# EAGLE board Diversity2 (EAGLE 6.5.0)
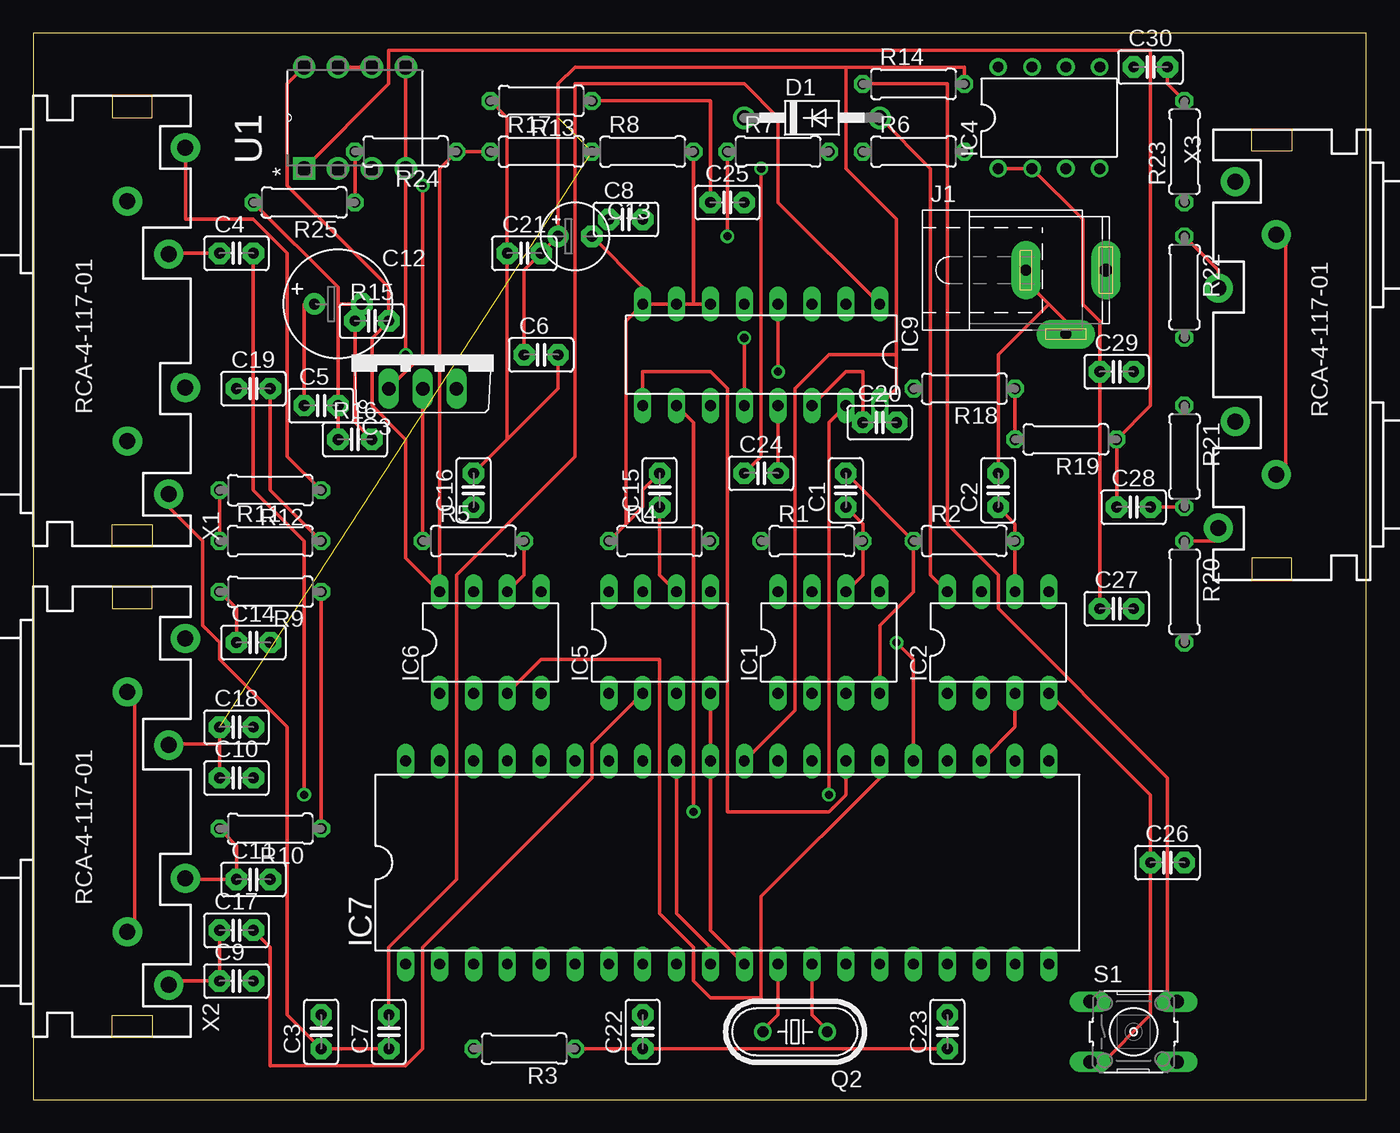
[diagram p0: board, top side]
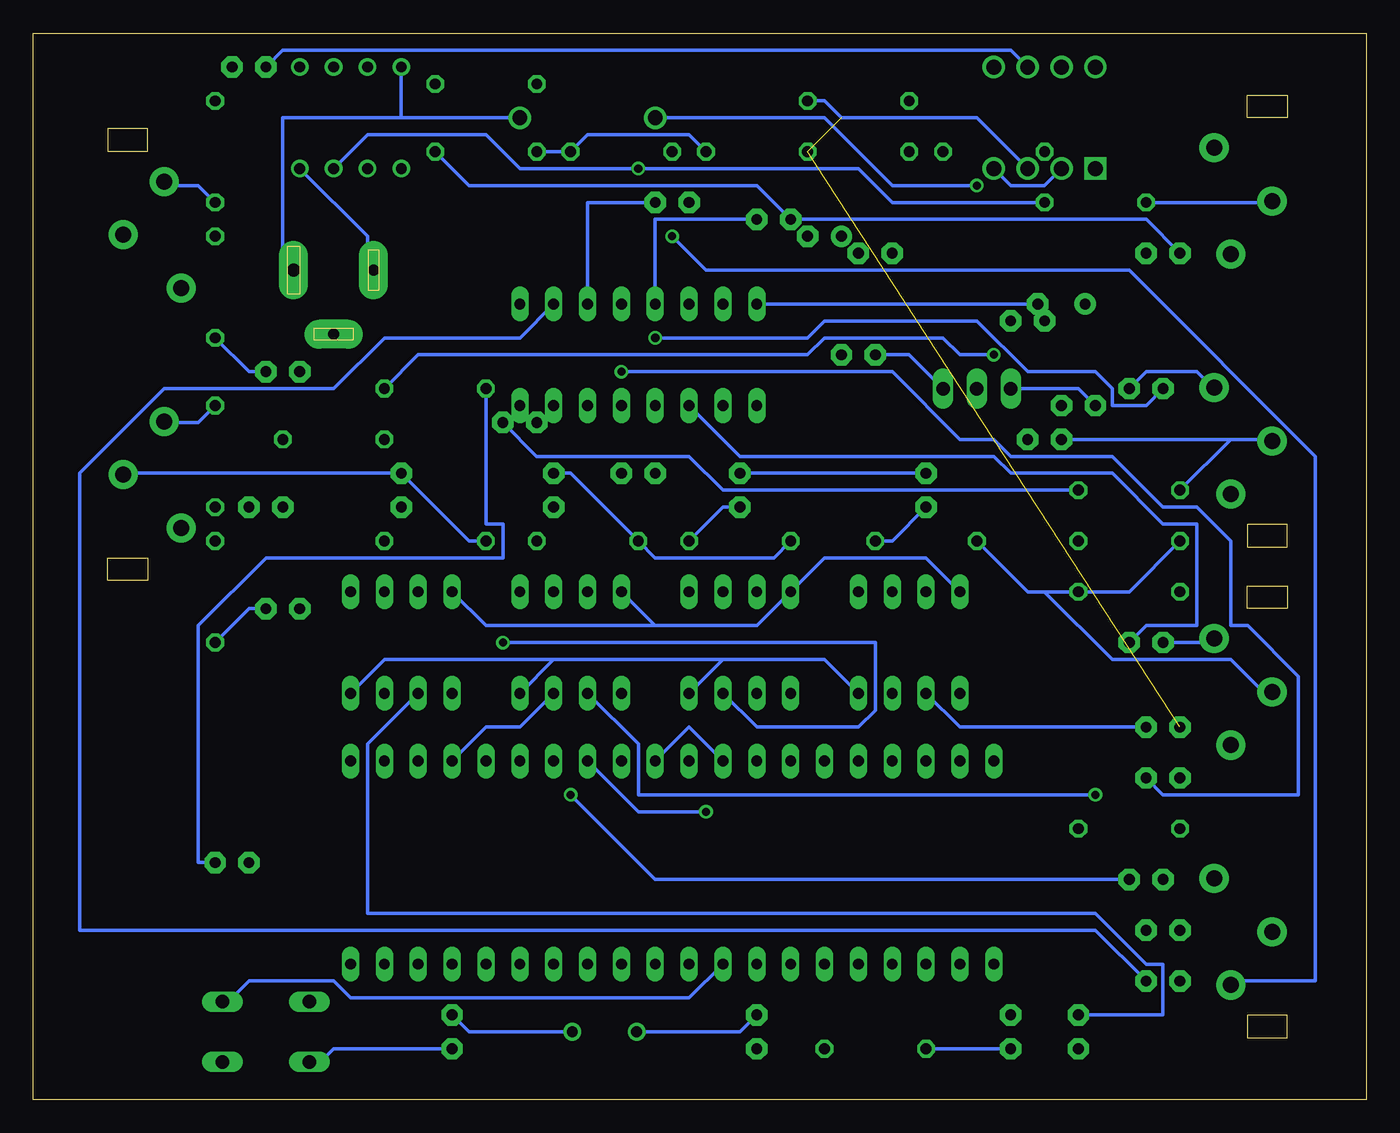
[diagram p1: board, bottom side, seen from below]

Size 100 x 80 mm. Coordinates in mm from the lower left corner, seen from the top.
Outline: 0,0 100,0 100,80 0,80 0,0
Copper layers (1*16): Top 0.035mm / dielectric 1.5mm / Bottom 0.035mm
Design rules "default": minimum track width 10mil, minimum drill 24mil, track to track 8mil, track to pad 8mil, pad to pad 8mil, via to via 8mil, smd to smd 8mil, copper to edge 40mil, drill to drill 8mil, minimum pad ring 10mil, minimum via ring 8mil, stop-mask expansion 4mil, vias tented up to drill 0mil, thermal gap 10mil

## Footprints (pad centres in the part's own frame; a part is rotated, then mirrored left to right if it is on the bottom)
C2.5-2 = drill 0.813 pad 1.6 octagon: 1 -1.27,0; 2 1.27,0
E3,5-8 = drill 0.813 pad 1.6: + -1.778,0 | drill 0.813 pad 1.6 octagon: - 1.778,0
E2,5-5 = drill 0.813 pad 1.6: + -1.27,0 | drill 0.813 pad 1.6 octagon: - 1.27,0
DO41-10 = drill 1.118: A 5.08,0; C -5.08,0
DIL08 = drill 0.813 long: 1 -3.81,-3.81; 2 -1.27,-3.81; 3 1.27,-3.81; 4 3.81,-3.81; 5 3.81,3.81; 6 1.27,3.81; 7 -1.27,3.81; 8 -3.81,3.81
TO220V = drill 1.016 long: 1 -2.54,-2.54; 2 0,-2.54; 3 2.54,-2.54
DIL08' = drill 0.813 pad 1.27: 1 -3.81,-3.81; 2 -1.27,-3.81; 3 1.27,-3.81; 4 3.81,-3.81; 5 3.81,3.81; 6 1.27,3.81; 7 -1.27,3.81; 8 -3.81,3.81
DIL40 = drill 0.813 long: 1 -24.13,-7.62; 2 -21.59,-7.62; 3 -19.05,-7.62; 4 -16.51,-7.62; 5 -13.97,-7.62; 6 -11.43,-7.62; 7 -8.89,-7.62; 8 -6.35,-7.62; 9 -3.81,-7.62; 10 -1.27,-7.62; 11 1.27,-7.62; 12 3.81,-7.62; 13 6.35,-7.62; 14 8.89,-7.62; 15 11.43,-7.62; 16 13.97,-7.62; 17 16.51,-7.62; 18 19.05,-7.62; 19 21.59,-7.62; 20 24.13,-7.62; 21 24.13,7.62; 22 21.59,7.62; 23 19.05,7.62; 24 16.51,7.62; 25 13.97,7.62; 26 11.43,7.62; 27 8.89,7.62; 28 6.35,7.62; 29 3.81,7.62; 30 1.27,7.62; 31 -1.27,7.62; 32 -3.81,7.62; 33 -6.35,7.62; 34 -8.89,7.62; 35 -11.43,7.62; 36 -13.97,7.62; 37 -16.51,7.62; 38 -19.05,7.62; 39 -21.59,7.62; 40 -24.13,7.62
DIL16 = drill 0.813 long: 1 -8.89,-3.81; 2 -6.35,-3.81; 3 -3.81,-3.81; 4 -1.27,-3.81; 5 1.27,-3.81; 6 3.81,-3.81; 7 6.35,-3.81; 8 8.89,-3.81; 9 8.89,3.81; 10 6.35,3.81; 11 3.81,3.81; 12 1.27,3.81; 13 -1.27,3.81; 14 -3.81,3.81; 15 -6.35,3.81; 16 -8.89,3.81
SPC4077 = drill 0.8 pad 2.184 long: 1 -3,0; 2 0,-4.8 | drill 1 pad 2.184 long: 3 3,0
HC49U-V = drill 0.813: 1 -2.413,0; 2 2.413,0
0207/7 = drill 0.813 octagon: 1 -3.81,0; 2 3.81,0
B3F-10XX = drill 1.016 long: 1 -3.251,2.261; 2 3.251,2.261; 3 -3.251,-2.261; 4 3.251,-2.261
DIP254P762X533-8 = drill 1.118 square: 1 -7.62,7.62 | drill 1.118: 2 -7.62,5.08; 3 -7.62,2.54; 4 -7.62,0; 5 0,0; 6 0,2.54; 7 0,5.08; 8 0,7.62
RCA-4-117-01 = drill 1.2 pad 2.184: 1 9,3.1; 2 5,0; 3 13,-1.25; 4 -9,3.1; 5 -13,0; 6 -5,-1.25

## Placement (x,y rotation side)
C1  100nF  [C2.5-2]  60.96,45.72 90 top
C2  100nF  [C2.5-2]  72.39,45.72 90 top
C3  100nF  [C2.5-2]  21.59,5.08 90 top
C4  100nF  [C2.5-2]  15.24,63.5 0 top
C5  100n  [C2.5-2]  21.59,52.07 0 top
C6  100n  [C2.5-2]  38.1,55.88 0 top
C7  1uF  [C2.5-2]  26.67,5.08 90 top
C8  1uF  [C2.5-2]  44.45,66.04 0 top
C9  1uF  [C2.5-2]  15.24,8.89 0 top
C10  1uF  [C2.5-2]  15.24,24.13 0 top
C11  1uF  [C2.5-2]  16.51,16.51 0 top
C12  [E3,5-8]  22.86,59.69 0 top
C13  [E2,5-5]  40.64,64.77 0 top
C14  1uF  [C2.5-2]  16.51,34.29 0 top
C15  100nF  [C2.5-2]  46.99,45.72 90 top
C16  100nF  [C2.5-2]  33.02,45.72 90 top
C17  100nF  [C2.5-2]  15.24,12.7 0 top
C18  100nF  [C2.5-2]  15.24,27.94 0 top
C19  1uF  [C2.5-2]  16.51,53.34 0 top
C20  1uF  [C2.5-2]  63.5,50.8 0 top
C21  100n  [C2.5-2]  36.83,63.5 0 top
C22  22pF  [C2.5-2]  45.72,5.08 90 top
C23  22pF  [C2.5-2]  68.58,5.08 90 top
C24  1uF  [C2.5-2]  54.61,46.99 0 top
C25  1uF  [C2.5-2]  52.07,67.31 0 top
C26  10uF  [C2.5-2]  85.09,17.78 0 top
C27  1uF  [C2.5-2]  81.28,36.83 0 top
C28  22uF  [C2.5-2]  82.55,44.45 0 top
C29  1uF  [C2.5-2]  81.28,54.61 0 top
C30  22uF  [C2.5-2]  83.82,77.47 0 top
D1  1N4004  [DO41-10]  58.42,73.66 0 top
IC1  LM1881  [DIL08]  59.69,34.29 0 top
IC2  LM1881  [DIL08]  72.39,34.29 0 top
IC3  7805TV  [TO220V]  29.21,55.88 0 top
IC4  NE5532N  [DIL08']  76.2,73.66 0 top
IC5  LM1881  [DIL08]  46.99,34.29 0 top
IC6  LM1881  [DIL08]  34.29,34.29 0 top
IC7  MEGA16-P  [DIL40]  52.07,17.78 0 top
IC9  4052N  [DIL16]  54.61,55.88 180 top
J1  [SPC4077]  77.47,62.23 0 top
Q2  16MHz  [HC49U-V]  57.15,5.08 180 top
R1  680k  [0207/7]  58.42,41.91 0 top
R2  680k  [0207/7]  69.85,41.91 0 top
R3  75  [0207/7]  36.83,3.81 180 top
R4  680k  [0207/7]  46.99,41.91 0 top
R5  680k  [0207/7]  33.02,41.91 0 top
R6  75  [0207/7]  66.04,71.12 0 top
R7  75  [0207/7]  55.88,71.12 0 top
R8  75  [0207/7]  45.72,71.12 0 top
R9  10k  [0207/7]  17.78,38.1 180 top
R10  10k  [0207/7]  17.78,20.32 180 top
R11  10k  [0207/7]  17.78,41.91 0 top
R12  10k  [0207/7]  17.78,45.72 180 top
R13  100k  [0207/7]  38.1,74.93 180 top
R14  10k  [0207/7]  66.04,76.2 0 top
R15  10k  [C2.5-2]  25.4,58.42 0 top
R16  3,3k  [C2.5-2]  24.13,49.53 0 top
R17  100k  [0207/7]  38.1,71.12 0 top
R18  1k  [0207/7]  69.85,53.34 180 top
R19  1k  [0207/7]  77.47,49.53 180 top
R20  4,7k  [0207/7]  86.36,38.1 270 top
R21  75  [0207/7]  86.36,48.26 270 top
R22  4,7k  [0207/7]  86.36,60.96 270 top
R23  75  [0207/7]  86.36,71.12 90 top
R24  100k  [0207/7]  27.94,71.12 180 top
R25  100k  [0207/7]  20.32,67.31 180 top
S1  [B3F-10XX]  82.55,5.08 0 top
U1  AD812ANZ  [DIP254P762X533-8]  27.94,77.47 90 top
X1  RCA-4-117-01  [RCA-4-117-01]  10.16,58.42 90 top
X2  RCA-4-117-01  [RCA-4-117-01]  10.16,21.59 90 top
X3  RCA-4-117-01  [RCA-4-117-01]  90.17,55.88 270 top

## Library data of the parts
C1-C11 C14-C30 R15 R16 = capacitor-wima
C12 C13 = rcl
D1 = diode
IC1 IC2 IC5 IC6 = lm1881
IC3 IC4 = linear
IC7 = atmel; MPN: ATMEGA16-16PU; OC_FARNELL: 9171142; OC_NEWARK: 01M6885
IC9 = 40xx
J1 = con-jack; OC_FARNELL: unknown; OC_NEWARK: unknown
Q2 = adafruit; OC_FARNELL: 1666969; OC_NEWARK: unknown
R1-R14 R17-R25 = resistor
S1 = switch-omron; MPN: B3F-1000; OC_FARNELL: 176432; OC_NEWARK: 36M3542
U1 = ADI-Phase-2; MPN: AD812ANZ; OC_FARNELL: 1424069; OC_NEWARK: 59K6382; PACKAGE: DIP-8; SUPPLIER: Analog Devices
X1-X3 = con-conrad

## Nets
+5V: C6.1 C13.+ C21.2 IC3.3 IC7.10 IC7.30 IC7.32 IC9.16 R14.2
+12V: D1.A IC1.8 IC2.8 IC4.8 IC5.8 IC6.8 J1.3 R15.2 R17.1 R24.1 U1.8
A0: R15.1 R16.2
A1: C19.2 R11.2 X1.6
A2: C20.2 R12.1 X1.3
A3: C11.1 R10.2 X2.6
A4: C14.1 R9.2 X2.3
GND: C1.2 C2.2 C5.2 C6.2 C12.- C13.- C15.2 C16.2 C21.1 C22.1 C23.1 C26.1 IC1.4 IC2.4 IC3.2 IC4.4 IC5.4 IC6.4 IC7.11 IC7.31 IC9.6 IC9.7 IC9.8 J1.1 J1.2 R1.1 R2.1 R3.1 R4.1 R5.1 R6.1 R7.2 R8.2 R9.1 R10.1 R11.1 R12.2 R13.2 R16.1 R25.2 S1.3 X1.1 X1.4 X2.1 X2.4 X3.1 X3.4
N$1: IC1.3 IC7.24
N$2: IC2.3 IC7.23
N$3: C4.1 C8.1 R6.2 X1.2
N$4: C4.2 IC1.2
N$5: C3.2 IC2.2
N$6: C7.2 IC9.1
N$7: C3.1 C7.1 R3.2 X1.5
N$8: C5.1 C12.+ D1.C IC3.1
N$9: C2.1 IC2.6 R2.2
N$10: C1.1 IC1.6 R1.2
N$11: C8.2 IC9.5
N$12: C9.2 IC9.2
N$13: C25.2 IC9.3
N$14: IC5.3 IC7.25
N$15: IC6.3 IC7.26
N$16: C11.2 IC9.15
N$17: C16.1 IC6.6 R5.2
N$18: C15.1 IC5.6 R4.2
N$19: C17.2 IC5.2
N$20: C9.1 C17.1 R7.1 X2.5
N$21: IC7.27 IC9.9
N$22: C18.2 IC6.2
N$23: C10.1 C18.1 R8.1 X2.2
N$25: C10.2 IC9.4
N$26: IC7.28 IC9.10
N$27: C24.2 IC9.13
N$28: C14.2 IC9.11
N$29: C19.1 IC9.12
N$30: C20.1 IC9.14
N$31: C25.1 R13.1 R17.2 U1.3
N$32: C26.2 R18.2
N$33: IC7.9 R14.1 S1.2
N$34: C23.2 IC7.13 Q2.1
N$35: C22.2 IC7.12 Q2.2
N$36: R18.1 R19.2 U1.2 U1.4 U1.5
N$37: C28.1 R19.1 U1.1
N$39: R20.1 X3.3
N$40: R21.1 X3.2
N$41: R22.1 X3.6
N$42: R23.1 X3.5
N$43: C27.2 R20.2
N$44: C28.2 R21.2
N$45: C29.2 R22.2
N$46: C30.2 R23.2
N$47: C24.1 IC4.3 R24.2 R25.1
N$48: C30.1 U1.6 U1.7
N$49: C27.1 C29.1 IC4.1 IC4.2

## Tracks (layer width: path | path; a pad name or v marks a point on that pad's centre or on a via)
+5V
  Top 0.254: IC7.32 48.26,13.97 50.8,11.43 IC7.10 | C6.1 36.83,62.23 C21.2 C13.+ 39.37,76.2 40.64,77.47 60.96,77.47 | IC9.16 64.77,53.34 64.77,55.88 | 64.77,55.88 64.77,66.04 60.96,69.85 60.96,77.47 | 60.96,77.47 69.85,77.47 R14.2 | IC7.30 57.15,29.21 57.15,53.34 59.69,55.88 64.77,55.88
  Bottom 0.254: IC7.30 50.8,27.94 IC7.32 | IC3.3 34.29,55.88 C6.1
+12V
  Top 0.254: U1.8 19.05,76.2 19.05,68.58 26.67,60.96 R15.2 25.4,57.15 25.4,52.07 27.94,49.53 27.94,40.64 IC6.8 30.48,69.85 R24.1 R17.1 | D1.A 67.31,69.85 67.31,39.37 IC2.8
  Bottom 0.254: 72.39,73.66 IC4.8 | D1.A 72.39,73.66 | 72.39,73.66 81.28,73.66 81.28,62.23 J1.3 | IC6.8 33.02,40.64 40.64,40.64 IC5.8 45.72,35.56 53.34,35.56 | 53.34,35.56 IC1.8 | IC2.8 66.04,35.56 53.34,35.56
A0
  Top 0.254: R16.2 24.13,50.8 R15.1
A1
  Top 0.254: R11.2 17.78,45.72 C19.2
  Bottom 0.254: C19.2 16.51,54.61 12.7,54.61 11.43,53.34 X1.6
A2
  Top 0.254: R12.1 19.05,48.26 19.05,63.5 16.51,66.04 11.43,66.04 11.43,71.12 X1.3
  Bottom 0.254: C20.2 62.23,48.26 50.8,48.26 48.26,45.72 R12.1
A3
  Top 0.254: R10.2 15.24,19.05 C11.1 11.43,16.51 X2.6
A4
  Top 0.254: R9.2 15.24,36.83 C14.1
  Bottom 0.254: C14.1 11.43,34.29 X2.3
GND
  Top 0.254: R3.1 C22.1 C23.1 | IC2.4 83.82,22.86 C26.1 83.82,6.35 80.01,2.54 S1.3 | IC5.4 IC7.31 50.8,12.7 IC7.11 | X3.1 93.98,46.99 93.98,64.77 X3.4 | 76.2,59.69 74.93,60.96 74.93,62.23 J1.1 | 76.2,59.69 77.47,58.42 J1.2 | C1.2 R2.1 66.04,38.1 63.5,35.56 IC1.4 | 76.2,59.69 72.39,55.88 C2.2 | IC9.8 IC9.7 49.53,59.69 | 49.53,59.69 IC9.6 | 49.53,59.69 R8.2 | C13.- 45.72,60.96 IC9.8 | R13.2 35.56,73.66 C21.1 35.56,49.53 | 44.45,43.18 45.72,44.45 45.72,45.72 C15.2 | 44.45,43.18 R4.1 | 35.56,49.53 39.37,53.34 C6.2 | 35.56,49.53 C16.2 | IC9.8 44.45,58.42 44.45,43.18 | R16.1 C5.2 22.86,59.69 | 22.86,59.69 C12.- | R25.2 22.86,60.96 22.86,59.69 | X2.4 7.62,12.7 7.62,30.48 X2.1 | R12.2 R11.1 | R9.1 R10.1 | R5.1 IC3.2
  Bottom 0.254: C23.1 77.47,3.81 78.74,2.54 S1.3 | IC6.4 40.64,33.02 48.26,33.02 | IC5.4 48.26,33.02 | 60.96,33.02 IC1.4 | 48.26,33.02 60.96,33.02 | IC2.4 73.66,33.02 60.96,33.02 | IC4.4 74.93,64.77 74.93,62.23 J1.1 | C1.2 59.69,46.99 R1.1 53.34,40.64 44.45,40.64 R4.1 | R2.1 67.31,41.91 C2.2 92.71,46.99 X3.1 | R6.1 R7.2 58.42,72.39 50.8,72.39 R8.2 | C16.2 C15.2 | R25.2 7.62,67.31 X1.1 | 10.16,49.53 R12.2 | 10.16,49.53 7.62,49.53 X1.4 | R5.1 25.4,38.1 24.13,38.1 | 24.13,38.1 R9.1 17.78,38.1 R11.1 | 24.13,38.1 19.05,33.02 10.16,33.02 7.62,30.48 X2.1 | 10.16,49.53 R16.1 | C12.- IC9.8
N$1
  Bottom 0.254: IC1.3 63.5,27.94 66.04,27.94 IC7.24
N$2
  Top 0.254: IC7.23 73.66,27.94 IC2.3
N$3
  Top 0.254: C4.1 10.16,63.5 X1.2
  Bottom 0.254: R6.2 67.31,68.58 45.72,68.58 C8.1 16.51,66.04 C4.1
N$4  (via drill 0.61)
  Top 0.254: v20.32,22.86 20.32,41.91 16.51,45.72 C4.2
  Bottom 0.254: IC1.2 54.61,26.67 54.61,22.86 v20.32,22.86
N$5
  Bottom 0.254: IC2.2 74.93,26.67 74.93,13.97 20.32,13.97 16.51,10.16 15.24,10.16 15.24,6.35 C3.2
N$6
  Top 0.254: IC9.1 55.88,67.31 55.88,73.66 53.34,76.2 40.64,76.2 40.64,48.26 31.75,39.37 31.75,16.51 26.67,11.43 C7.2
N$7
  Top 0.254: C7.1 C3.1 19.05,6.35 19.05,27.94 13.97,33.02 13.97,34.29 12.7,35.56 12.7,41.91 10.16,44.45 X1.5
  Bottom 0.254: C7.1 R3.2
N$8  (via drill 0.61)
  Top 0.254: C5.1 20.32,59.69 C12.+ | v29.21,68.58 29.21,55.88 IC3.1
  Bottom 0.254: IC3.1 21.59,53.34 C5.1 | D1.C 40.64,73.66 35.56,68.58 v29.21,68.58
N$9
  Top 0.254: IC2.6 R2.2 73.66,43.18 C2.1
N$10
  Top 0.254: IC1.6 62.23,39.37 R1.2 62.23,43.18 C1.1
N$11
  Bottom 0.254: IC9.5 53.34,66.04 C8.2
N$12
  Bottom 0.254: IC9.2 63.5,57.15 73.66,57.15 77.47,53.34 90.17,53.34 96.52,46.99 96.52,12.7 20.32,12.7 C9.2
N$13
  Bottom 0.254: IC9.3 58.42,67.31 C25.2
N$14  (via drill 0.61)
  Top 0.254: v64.77,34.29 66.04,33.02 IC7.25
  Bottom 0.254: IC5.3 45.72,27.94 38.1,27.94 36.83,29.21 36.83,34.29 v64.77,34.29
N$15
  Top 0.254: IC6.3 38.1,33.02 46.99,33.02 46.99,13.97 49.53,11.43 49.53,8.89 50.8,7.62 54.61,7.62 54.61,15.24 63.5,24.13 IC7.26
N$16  (via drill 0.61)
  Top 0.254: IC9.15 59.69,50.8 v59.69,22.86
  Bottom 0.254: v59.69,22.86 53.34,16.51 C11.2
N$17
  Top 0.254: IC6.6 36.83,39.37 R5.2
  Bottom 0.254: C16.1 35.56,41.91 R5.2
N$18
  Top 0.254: IC5.6 46.99,39.37 C15.1
  Bottom 0.254: R4.2 48.26,44.45 C15.1
N$19
  Top 0.254: IC5.2 41.91,26.67 41.91,24.13 29.21,11.43 29.21,3.81 27.94,2.54 17.78,2.54 17.78,11.43 C17.2
N$20  (via drill 0.61)
  Top 0.254: v52.07,64.77 R7.1 | X2.5 10.16,8.89 C9.1 C17.1
  Bottom 0.254: v52.07,64.77 49.53,62.23 17.78,62.23 3.81,48.26 3.81,8.89 10.16,8.89 X2.5
N$21
  Top 0.254: IC7.27 60.96,22.86 59.69,21.59 52.07,21.59 52.07,53.34 50.8,54.61 45.72,54.61 IC9.9
N$22
  Bottom 0.254: IC6.2 30.48,27.94 C18.2
N$23  (1 unrouted)
  Top 0.254: C18.1 13.97,26.67 | 13.97,26.67 C10.1 | 13.97,26.67 10.16,26.67 X2.2
N$25  (via drill 0.61)
  Top 0.254: v55.88,54.61 IC9.4
  Bottom 0.254: v55.88,54.61 35.56,54.61 30.48,49.53 27.94,49.53 26.67,48.26 19.05,48.26 15.24,44.45 12.7,44.45 10.16,41.91 10.16,35.56 8.89,35.56 5.08,31.75 5.08,22.86 15.24,22.86 C10.2
N$26  (via drill 0.61)
  Top 0.254: v49.53,21.59 49.53,50.8 IC9.10
  Bottom 0.254: IC7.28 54.61,21.59 v49.53,21.59
N$27
  Top 0.254: C24.2 IC9.13
N$28
  Bottom 0.254: IC9.11 46.99,48.26 27.94,48.26 26.67,46.99 19.05,46.99 15.24,43.18 12.7,43.18 12.7,35.56 16.51,35.56 C14.2
N$29  (via drill 0.61)
  Top 0.254: v53.34,57.15 IC9.12
  Bottom 0.254: v53.34,57.15 41.91,57.15 40.64,58.42 29.21,58.42 25.4,54.61 20.32,54.61 19.05,53.34 19.05,52.07 16.51,52.07 C19.1
N$30
  Top 0.254: IC9.14 60.96,54.61 62.23,54.61 C20.1
N$31  (1 unrouted)
  Top 0.254: R13.1 50.8,74.93 C25.1
  Bottom 0.254: U1.3 29.21,73.66 39.37,73.66 40.64,74.93 R13.1
N$32
  Bottom 0.254: R18.2 66.04,43.18 64.77,43.18 64.77,40.64 82.55,40.64 87.63,35.56 87.63,17.78 C26.2
N$33
  Top 0.254: R14.1 68.58,76.2 68.58,43.18 72.39,39.37 72.39,36.83 85.09,24.13 85.09,7.62 S1.2
  Bottom 0.254: IC7.9 50.8,7.62 76.2,7.62 77.47,8.89 83.82,8.89 85.09,7.62 S1.2
N$34
  Top 0.254: IC7.13 58.42,6.35 59.69,5.08 Q2.1
  Bottom 0.254: C23.2 67.31,5.08 Q2.1
N$35
  Top 0.254: IC7.12 55.88,6.35 54.61,5.08 Q2.2
  Bottom 0.254: C22.2 46.99,5.08 Q2.2
N$36  (via drill 0.61)
  Top 0.254: R18.1 R19.2 | U1.5 U1.4 v27.94,55.88
  Bottom 0.254: U1.2 24.13,68.58 26.67,68.58 U1.4 | R18.1 71.12,55.88 41.91,55.88 40.64,57.15 31.75,57.15 30.48,55.88 v27.94,55.88
N$37
  Top 0.254: C28.1 R19.1 83.82,52.07 83.82,78.74 26.67,78.74 26.67,76.2 U1.1
N$39
  Top 0.254: R20.1 88.9,41.91 X3.3
N$40
  Bottom 0.254: R21.1 87.63,50.8 90.17,50.8 X3.2
N$41
  Top 0.254: R22.1 88.9,62.23 88.9,60.96 X3.6
N$42
  Bottom 0.254: R23.1 87.63,68.58 90.17,68.58 X3.5
N$43
  Bottom 0.254: R20.2 83.82,36.83 C27.2
N$44
  Top 0.254: C28.2 R21.2
N$45
  Bottom 0.254: R22.2 83.82,54.61 C29.2
N$46
  Top 0.254: R23.2 85.09,76.2 C30.2
N$47  (via drill 0.61)
  Top 0.254: R24.2 R25.1 | C24.1 54.61,48.26 v54.61,69.85
  Bottom 0.254: IC4.3 74.93,72.39 66.04,72.39 63.5,69.85 v54.61,69.85 38.1,69.85 35.56,67.31 R25.1
N$48
  Top 0.254: U1.6 U1.7
  Bottom 0.254: C30.1 81.28,78.74 26.67,78.74 U1.6
N$49
  Top 0.254: IC4.1 IC4.2 78.74,66.04 78.74,59.69 80.01,58.42 C29.1 C27.1